# Altium PCB ws2812_2020_breakout.PcbDoc
Units mil, origin at the board's own origin, x right, y up, seen from the top; angles counter-clockwise.
Board outline 410 x 310 mil, 2 copper layers (Top Layer, Bottom Layer); 4 components, 4 nets, 12 pads, 1 vias.
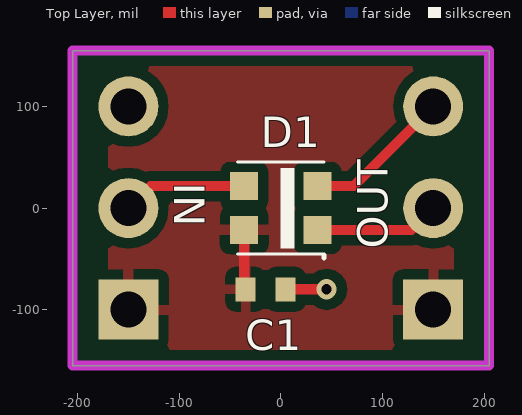
[diagram p0: Top Layer view]
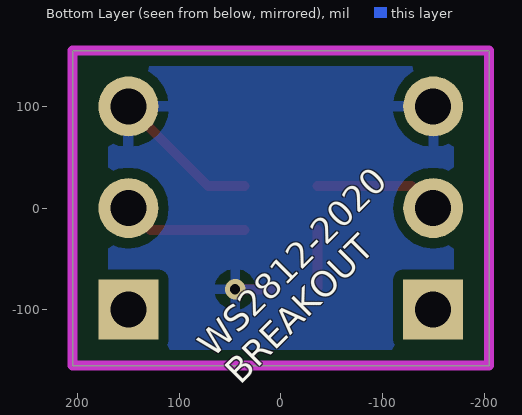
[diagram p1: Bottom Layer view, seen from below]

## Layer stack, top to bottom
Top Solder: solder mask 0.4, Solder Resist, Dk 3.5
Top Layer: signal copper 1.4
Dielectric 1: dielectric 12.6, FR-4, Dk 4.8
Bottom Layer: signal copper 1.4
Bottom Solder: solder mask 0.4, Solder Resist, Dk 3.5

## Board outline
-205,-155 -205,155 205,155 205,-155

## Design rules (kind name [scope] priority, off if disabled: settings)
Clearance [All] p1: gap=10 ignorepadtopadclearanceinfootprint=FALSE except(0: Arc-Hole Track-Hole SMDPad-Hole THPad-Hole Via-Hole Fill-Hole Poly-Hole Region-Hole Text-Hole)
PolygonConnect [All] p1: connectstyle=Relief reliefconductorwidth=10 reliefentries=4 polygonreliefangle="90 Angle" airgapwidth=10
RoomDefinition ws2812_2020_breakout [InComponentClass('ws2812_2020_breakout')] p1: confinementstyle=ConfineIn formatcopy=TRUE lockcomponents=FALSE outline -985,-900 1145,-900 1145,1130 -985,1130
RoutingVias [All] p1: holewidth=10 width=20 viastyle="Through Hole" minholewidth=10 minwidth=20 maxholewidth=28 maxwidth=50
SolderMaskExpansion [All] p1: expansion=4
Width [All] p1: maxlimit=10 minlimit=10 preferedwidth=10
30 further rules are at their usual default settings.

## Components (designator, comment, footprint, x,y, rotation, side; value= is the part's Value field where it differs from the comment)
C1 "" CAP_0402R -15,-80 r180 top value=0.1uF
D1 "WS2812-2020" WS2812-2020 0,0 r0 top
IN "Header 3" HDR1X3 -150,-100 r90 top
OUT "Header 3" HDR1X3 150,-100 r90 top

## Footprints (in the part's own frame and the unit in brackets; to place one, negate y for a bottom-side part, rotate by r counter-clockwise, add the part's x,y. Pads: shape width x height; smd on the part's side, far side on the other; paste and mask are expansions set on the pad)
CAP_0402R [mm] "Capacitor 0402 reflow soldering"
  rect 0.5x0.6 smd: 1(-0.5,0) 2(0.5,0)
  body extent -0.5,-0.3 0.5,0.3, height 0.2
HDR1X3 [mm] "Connector; Header; 3 Position"
  rect 1.5x1.5 hole 0.9: 1(0,0)
  round 1.5 hole 0.9: 2(2.54,0) 3(5.08,0)
WS2812-2020 [mm]
  rect 0.7x0.7 smd: 1(0.915,-0.55) 2(0.915,0.55) 3(-0.915,0.55) 4(-0.915,-0.55)
  silkscreen extent -1.08,-1.25 1.08,1.15, body extent -1.1,-1 1.1,1, height 0.84

## Part data
C1: library part CAP, "Capacitor"
D1: "Intelligent control LED integrated light source, low current, 2020 package", Manufacturer=Worldsemi, MPN=WS2812-2020
IN OUT: "Header, 3-Pin"

## Via types
v1: diameter 20, hole 10, Top Layer to Bottom Layer, tented both sides, 1 vias

## Nets (pads, with @x,y where several pads share a name; then routed paths per layer and width w, separated by ;. In a path a pad name is that pad's centre, name@x,y a point inside that pad or via, vN(x,y) a via of type N, cw(c..) or ccw(c..) an arc to the next point about the centre after c; other vN are vias at no path point)
GND: C1.1 D1.2 IN.3 OUT.3 | length 186.7
  Top Layer w10: C1.1 v1(45,-80) ; D1.2 71.65,21.65 OUT.3
NetD1_1: D1.1 OUT.2 | length 122.9
  Top Layer w10: D1.1 128.35,-21.65 OUT.2
NetD1_3: D1.3 IN.2 | length 122.9
  Top Layer w10: IN.2 -128.35,21.65 D1.3
VDD: C1.2 D1.4 IN.1 OUT.1 | length 57
  Top Layer w10: C1.2@-36.02,-78.66 D1.4

## Polygon pours and split planes (outlines as drawn)
VDD on Top Layer "Top - VDD" (solid, remove dead copper, pour order 2): -170,155 170,155 170,-155 -170,-155
GND on Bottom Layer "Bottom - GND" (solid, remove dead copper, pour order 0): -170,155 170,155 170,-155 -170,-155

## Keep-outs
Keep-Out Layer:
  the board outline again, w10

## Silkscreen, mask and mechanical layers (free items; w line width, h text height)
Bottom Overlay:
  text "WS2812-2020 / BREAKOUT" at 40,-175 h25 r315